# Altium PCB Bluetooth.PcbDoc
Units mil, origin at the board's own origin, x right, y up, seen from the top; angles counter-clockwise.
Board outline 6000 x 4000 mil, 2 copper layers (Top Layer, Bottom Layer); 8 components, 171 nets, 22 pads, 0 vias.
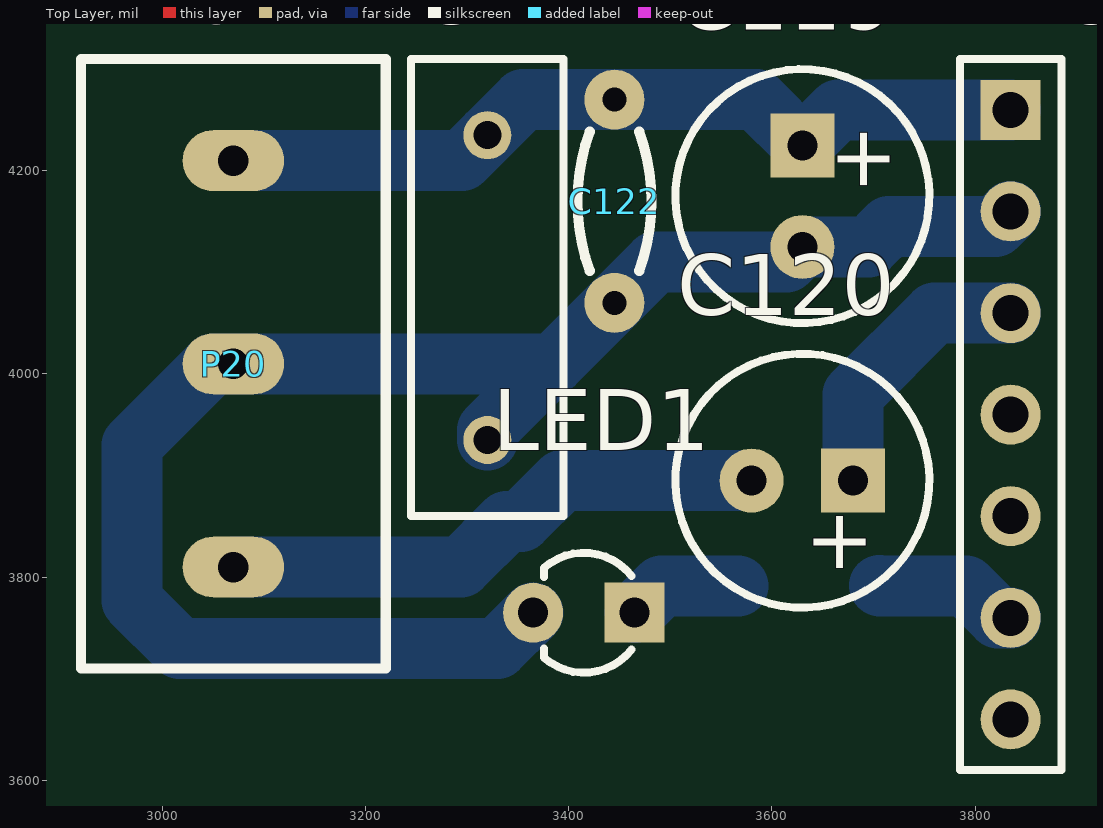
[diagram p0: Top Layer view]
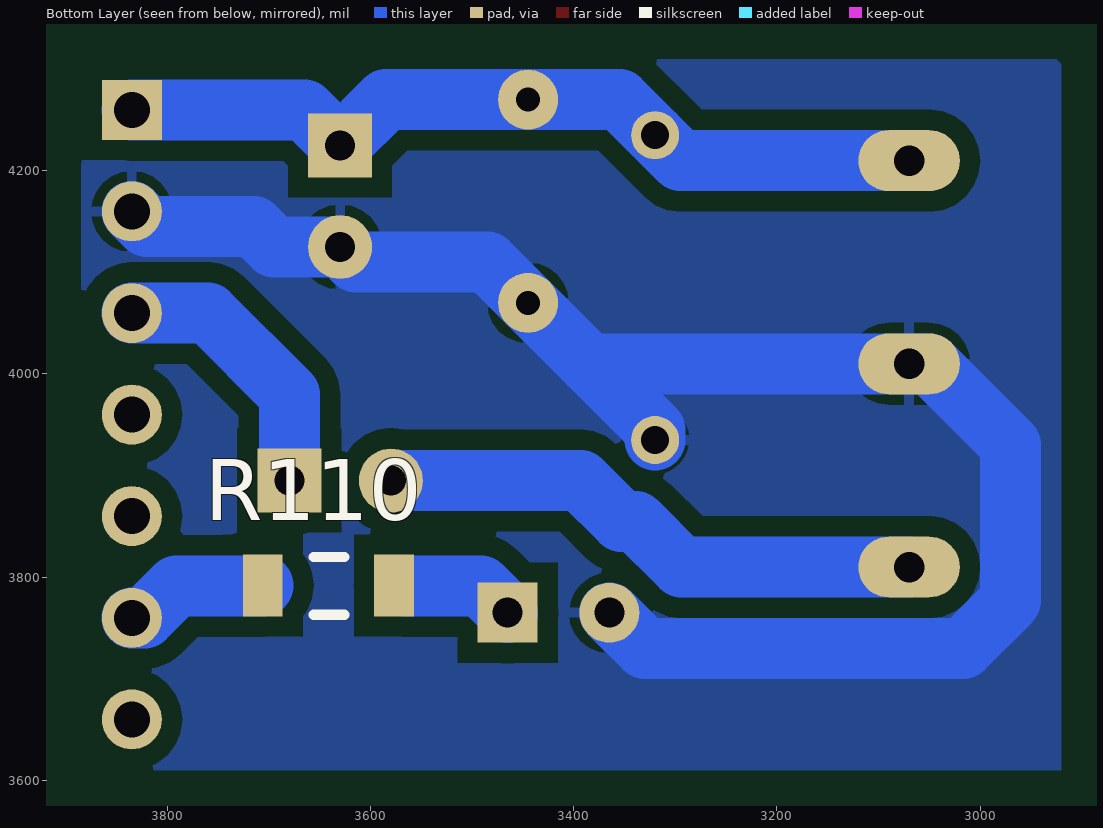
[diagram p1: Bottom Layer view, seen from below]
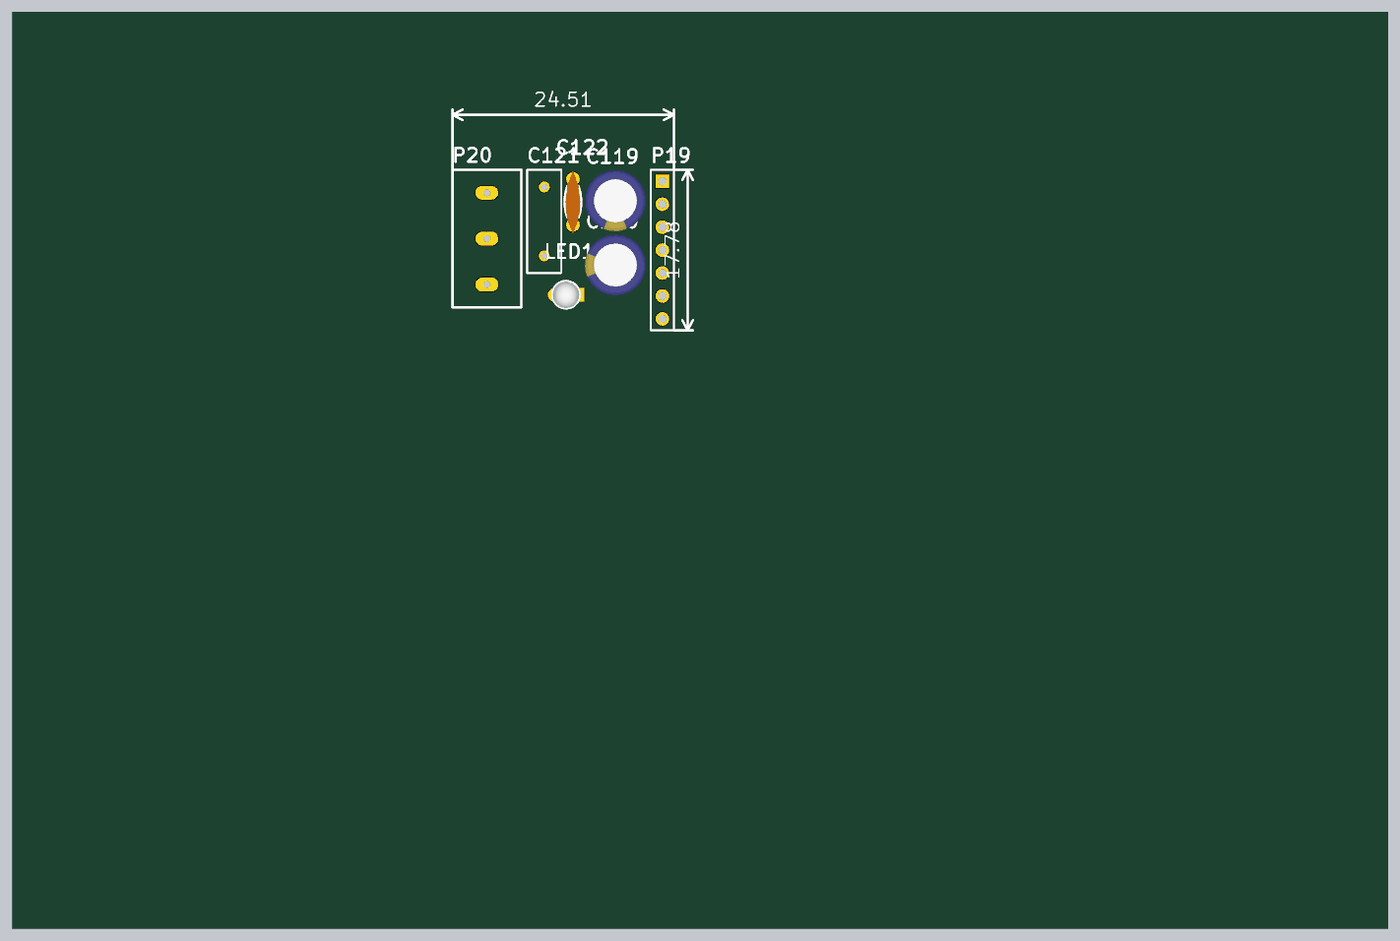
[diagram p2: 3D render of the assembled board from above, using the file's embedded part models]

## Layer stack, top to bottom
Top Solder: solder mask 0.4, Solder Resist, Dk 3.5
Top Layer: signal copper 1.4
Dielectric 1: dielectric 12.6, FR-4, Dk 4.8
Bottom Layer: signal copper 1.4
Bottom Solder: solder mask 0.4, Solder Resist, Dk 3.5

## Board outline
1000,1000 7000,1000 7000,5000 1000,5000

## Design rules (kind name [scope] priority, off if disabled: settings)
Clearance [All] p1: gap=20 ignorepadtopadclearanceinfootprint=FALSE except(0: Arc-Hole Track-Hole SMDPad-Hole THPad-Hole Via-Hole Fill-Hole Poly-Hole Region-Hole Text-Hole)
PolygonConnect [All] p1: connectstyle=Relief reliefconductorwidth=10 reliefentries=4 polygonreliefangle="90 Angle" airgapwidth=10
RoutingVias [All] p1: holewidth=28 width=50 viastyle="Through Hole" minholewidth=28 minwidth=50 maxholewidth=28 maxwidth=50
SolderMaskExpansion [All] p1: expansion=4 istentingtop=FALSE
Width [All] p1: maxlimit=60 minlimit=60 preferedwidth=60 minimp=50.000000 maximp=50.000000 favimp=50.000000
30 further rules are at their usual default settings.

## Classes and differential pairs
component class Triangular: U4
component class "Positive Pwr": *1
component class "Pasa Banda Superior": C94 C95 C104 C105 C109 C110
component class "Pasa Banda Inferior": C80 C81 C82 C83 C84 C87 C88
component class "Pasa Bajos": C67 C68 C69 C72
component class "Pasa Altos": C59 C60 C61 C62 C65 C66
component class "Negative Pwr": *2

## Components (designator, comment, footprint, x,y, rotation, side; value= is the part's Value field where it differs from the comment)
C119 "Cap Pol1" "CAPR D250 H450 R100 mil" 3630,4175 r270 top value=10uF
C120 "Cap Pol1" "CAPR D250 H450 R100 mil" 3630,3895 r180 top value=10uF
C121 "Cap" RAD-0.3 3320,4085 r90 top value=10nF
C122 "Cap" "CAP DISCO 200mil" 3445,4170 r90 top value=100nF
LED1 "Diodo Led" "Led 3mm AMARILLO" 3415,3765 r180 top
P19 "Header 7" HDR1X7 3835,4260 r270 top
P20 "Header 3" "bornera 3" 3070,3810 r90 top
R110 "Res2" "1206 resistor" 3640,3790 r0 bottom value=47K

## Footprints (in the part's own frame and the unit in brackets; to place one, negate y for a bottom-side part, rotate by r counter-clockwise, add the part's x,y. Pads: shape width x height; smd on the part's side, far side on the other; paste and mask are expansions set on the pad)
"1206 resistor" [mil]
  rect 39x61 smd: 1(-63,-2) 2(66,-2)
  silkscreen extent -14,-30 16,27
"bornera 3" [mil]
  oval 60x100 hole 30: 1(0,0) 2(200,0) 3(400,0)
  silkscreen extent -100,-150 500,150
"CAP DISCO 200mil" [mm] "Capacitor; 2 Leads"
  round 1.5 hole 0.6: 1(-2.54,0) 2(2.54,0)
  silkscreen extent -1.74,-0.93 1.74,0.93, body extent -3.5,-0.85 3.49,0.85, height 7.5
"CAPR D250 H450 R100 mil" [mm]
  rect 1.6x1.6 hole 0.75: 1(-1.27,0)
  round 1.6 hole 0.75: 2(1.27,0)
  silkscreen extent -3.17,-3.17 3.17,3.17, body extent -3.4,-3.39 3.37,3.39, height 2.49
HDR1X7 [mm] "Connector; Header; 7 Position"
  rect 1.5x1.5 hole 0.9: 1(0,0)
  round 1.5 hole 0.9: 2(2.54,0) 3(5.08,0) 4(7.62,0) 5(10.16,0) 6(12.7,0) 7(15.24,0)
  silkscreen extent -1.27,-1.27 16.51,1.27
"Led 3mm AMARILLO" [mm]
  rect 1.5x1.5 hole 0.75: 1(-1.27,0)
  round 1.5 hole 0.75: 2(1.27,0)
  silkscreen extent -1.18,-1.5 1,1.5, body extent -1.65,-1.65 1.65,1.64, height 5.51
RAD-0.3 [mm] "Radial Cap, Thru-Hole; 2 Leads; 0.3 in Pin Spacing"
  round 1.2 hole 0.7: 1(-3.81,0) 2(3.81,0)
  silkscreen extent -5.71,-1.91 5.71,1.91

## Part data
C119 C120: "Polarized Capacitor (Radial)", LatestRevisionDate=17-Jul-2002, LatestRevisionNote="Re-released for DXP Platform.", PackageDescription="Polarized Capacitor (Radial); 2 Leads", PackageReference=RB7.6-15, Published=8-Jun-2000, Publisher="Altium Limited"
C121 C122: "Capacitor", LatestRevisionDate=17-Jul-2002, LatestRevisionNote="Re-released for DXP Platform.", PackageDescription="Radial Cap, Thru-Hole; 2 Leads; 0.3 in Pin Spacing", PackageReference=RAD-0.3, Published=8-Jun-2000, Publisher="Altium Limited"
LED1: "Led 3mm", FABRICANTE=Generico, VALOR="Led Xmm (COLOR)"
P19: "Header, 7-Pin", LatestRevisionDate=17-Jul-2002, LatestRevisionNote="Re-released for DXP Platform.", Publisher="Altium Limited"
P20: "Header, 3-Pin", LatestRevisionDate=17-Jul-2002, LatestRevisionNote="Re-released for DXP Platform.", Publisher="Altium Limited"
R110: "Resistor", LatestRevisionDate=17-Jul-2002, LatestRevisionNote="Re-released for DXP Platform.", PackageDescription="Axial Device, Thru-Hole; 2 Leads; 0.4 in Pin Spacing", PackageReference=AXIAL-0.4, Published=8-Jun-2000, Publisher="Altium Limited"

## Nets (pads, with @x,y where several pads share a name; then routed paths per layer and width w, separated by ;. In a path a pad name is that pad's centre, name@x,y a point inside that pad or via, vN(x,y) a via of type N, cw(c..) or ccw(c..) an arc to the next point about the centre after c; other vN are vias at no path point)
12V: 
32V: 
-12V: 
-20V: 
-32V: 
GND: 
Net1_2: 
Net1_3: 
Net1_4: 
Net1_6: 
Net1_7: 
Net1_10: 
Net1_11: 
Net1_12: 
Net*1_1: 
Net*1_2: 
Net*1_3: 
Net*1_4: 
Net*1_5: 
Net*1_6: 
Net*2_2: 
Net*2_4: 
Net*2_5: 
Net*2_6: 
NetB1_1: 
NetB1_3: 
NetC21_1: 
NetC22_1: 
NetC22_2: 
NetC23_1: 
NetC23_2: 
NetC24_1: 
NetC24_2: 
NetC29_2: 
NetC30_1: 
NetC30_2: 
NetC33_1: 
NetC33_2: 
NetC34_2: 
NetC35_2: 
NetC38_2: 
NetC44_1: 
NetC45_1: 
NetC48_1: 
NetC49_2: 
NetC51_1: 
NetC55_1: 
NetC56_2: 
NetC58_2: 
NetC59_1: 
NetC59_2: 
NetC60_1: 
NetC61_1: 
NetC61_2: 
NetC62_1: 
NetC67_1: 
NetC67_2: 
NetC68_1: 
NetC68_2: 
NetC71_1: 
NetC72_2: 
NetC77_1: 
NetC77_2: 
NetC78_1: 
NetC79_1: 
NetC79_2: 
NetC82_1: 
NetC82_2: 
NetC84_1: 
NetC85_1: 
NetC85_2: 
NetC93_1: 
NetC93_2: 
NetC94_1: 
NetC95_1: 
NetC95_2: 
NetC96_1: 
NetC96_2: 
NetC101_1: 
NetC102_1: 
NetC102_2: 
NetC117_2: 
NetC118_2: 
NetC119_1: C119.1 C121.2 C122.2 P19.1 P20.3 | length 823
  Bottom Layer w60: P20.3 3295,4210 C121.2 3355,4270 3585,4270 C119.1 3665,4260 P19.1
NetC119_2: C119.2 C121.1 C122.1 LED1.2 P19.2 P20.2 | length 1643.4
  Bottom Layer w60: C121.1 3320,3945 3385,4010 ; LED1.2 3330,3730 3016.86,3730 2970,3776.86 2970,3930 3050,4010 3385,4010 ; C119.2@3629.19,4125 3614.19,4110 3485,4110 C122.1 3385,4010 ; C119.2 3695,4125 3715,4145 3820,4145 P19.2
NetC120_1: C120.1 P19.3 | length 273.1
  Bottom Layer w60: C120.1 3680,3980 3760,4060 P19.3
NetC120_2: C120.2 P20.1 | length 545.2
  Bottom Layer w60: P20.1 3293.99,3810 3338.99,3855 3353.14,3855 3393.14,3895 C120.2
NetD1_2: 
NetD1_4: 
NetD8_1: 
NetD8_2: 
NetD10_1: 
NetD10_2: 
NetD12_2: 
NetD13_2: 
NetD16_2: 
NetD18_2: 
NetD19_2: 
NetD22_2: 
NetF1_1: 
NetF1_2: 
NetJack2_1: 
NetLED1_1: LED1.1 R110.1 | length 112.5
  Bottom Layer w60: LED1.1 3491.5,3791.5 R110.1@3566.5,3791.5
NetP7_1: 
NetP7_2: 
NetP7_3: 
NetP10_1: 
NetP12_1: 
NetP13_1: 
NetP14_2: 
NetP15_1: 
NetP15_2: 
NetP15_3: 
NetP15_4: 
NetP19_6: P19.6 R110.2 | length 142.3
  Bottom Layer w60: R110.2 3706.5,3791.5 3791.03,3791.5 3822.53,3760 P19.6
NetQ1_1: 
NetQ1_2: 
NetR7_1: 
NetR9_2: 
NetR17_1: 
NetR21_1: 
NetR25_1: 
NetR27_2: 
NetR28_1: 
NetR29_1: 
NetR30_1: 
NetR32_2: 
NetR33_2: 
NetR36_2: 
NetR38_2: 
NetR39_2: 
NetR41_1: 
NetR45_1: 
NetR46_1: 
NetR47_1: 
NetR48_1: 
NetR50_2: 
NetR51_2: 
NetR52_2: 
NetR53_2: 
NetR54_2: 
NetR55_2: 
NetR56_1: 
NetR60_2: 
NetR62_1: 
NetR66_1: 
NetR67_1: 
NetR68_1: 
NetR72_2: 
NetR74_1: 
NetR75_1: 
NetR76_1: 
NetR77_1: 
NetR79_2: 
NetR80_2: 
NetR81_2: 
NetR82_2: 
NetR83_2: 
NetR84_1: 
NetR86_1: 
NetR88_2: 
NetR90_2: 
NetR92_1: 
NetR96_1: 
NetR97_1: 
NetR98_1: 
NetR100_1: 
NetR106_1: 
NetRP1_3: 
NetRP2_3: 
NetRP3_1: 
pads on no net: P19.4 P19.5 P19.7

## Polygon pours and split planes (outlines as drawn)
NetC119_2 on Bottom Layer "NETC119_2_L02_P000" (solid, pour order 0): 2920,4305 2925,4310 3885,4310 3885,3610 2920,3610

## Dimensions
3885,4310 to 3885,3610 on Top Overlay
2920,4310 to 3885,4310 on Top Overlay

## Text inside footprints (layer, text, board x,y; h text height)
C119: Top Overlay "+" at 3665,4246 h60 r270
C120: Top Overlay "+" at 3701,3860 h60 r180